# Altium PCB LineDetection.PcbDoc
Units mm, origin at the board's own origin, x right, y up, seen from the top; angles counter-clockwise.
Board outline 100 x 100 mm, 2 copper layers (Top Layer, Bottom Layer); 57 components, 40 nets, 256 pads, 15 vias.
Unrouted connection lines stored in the file: 16.
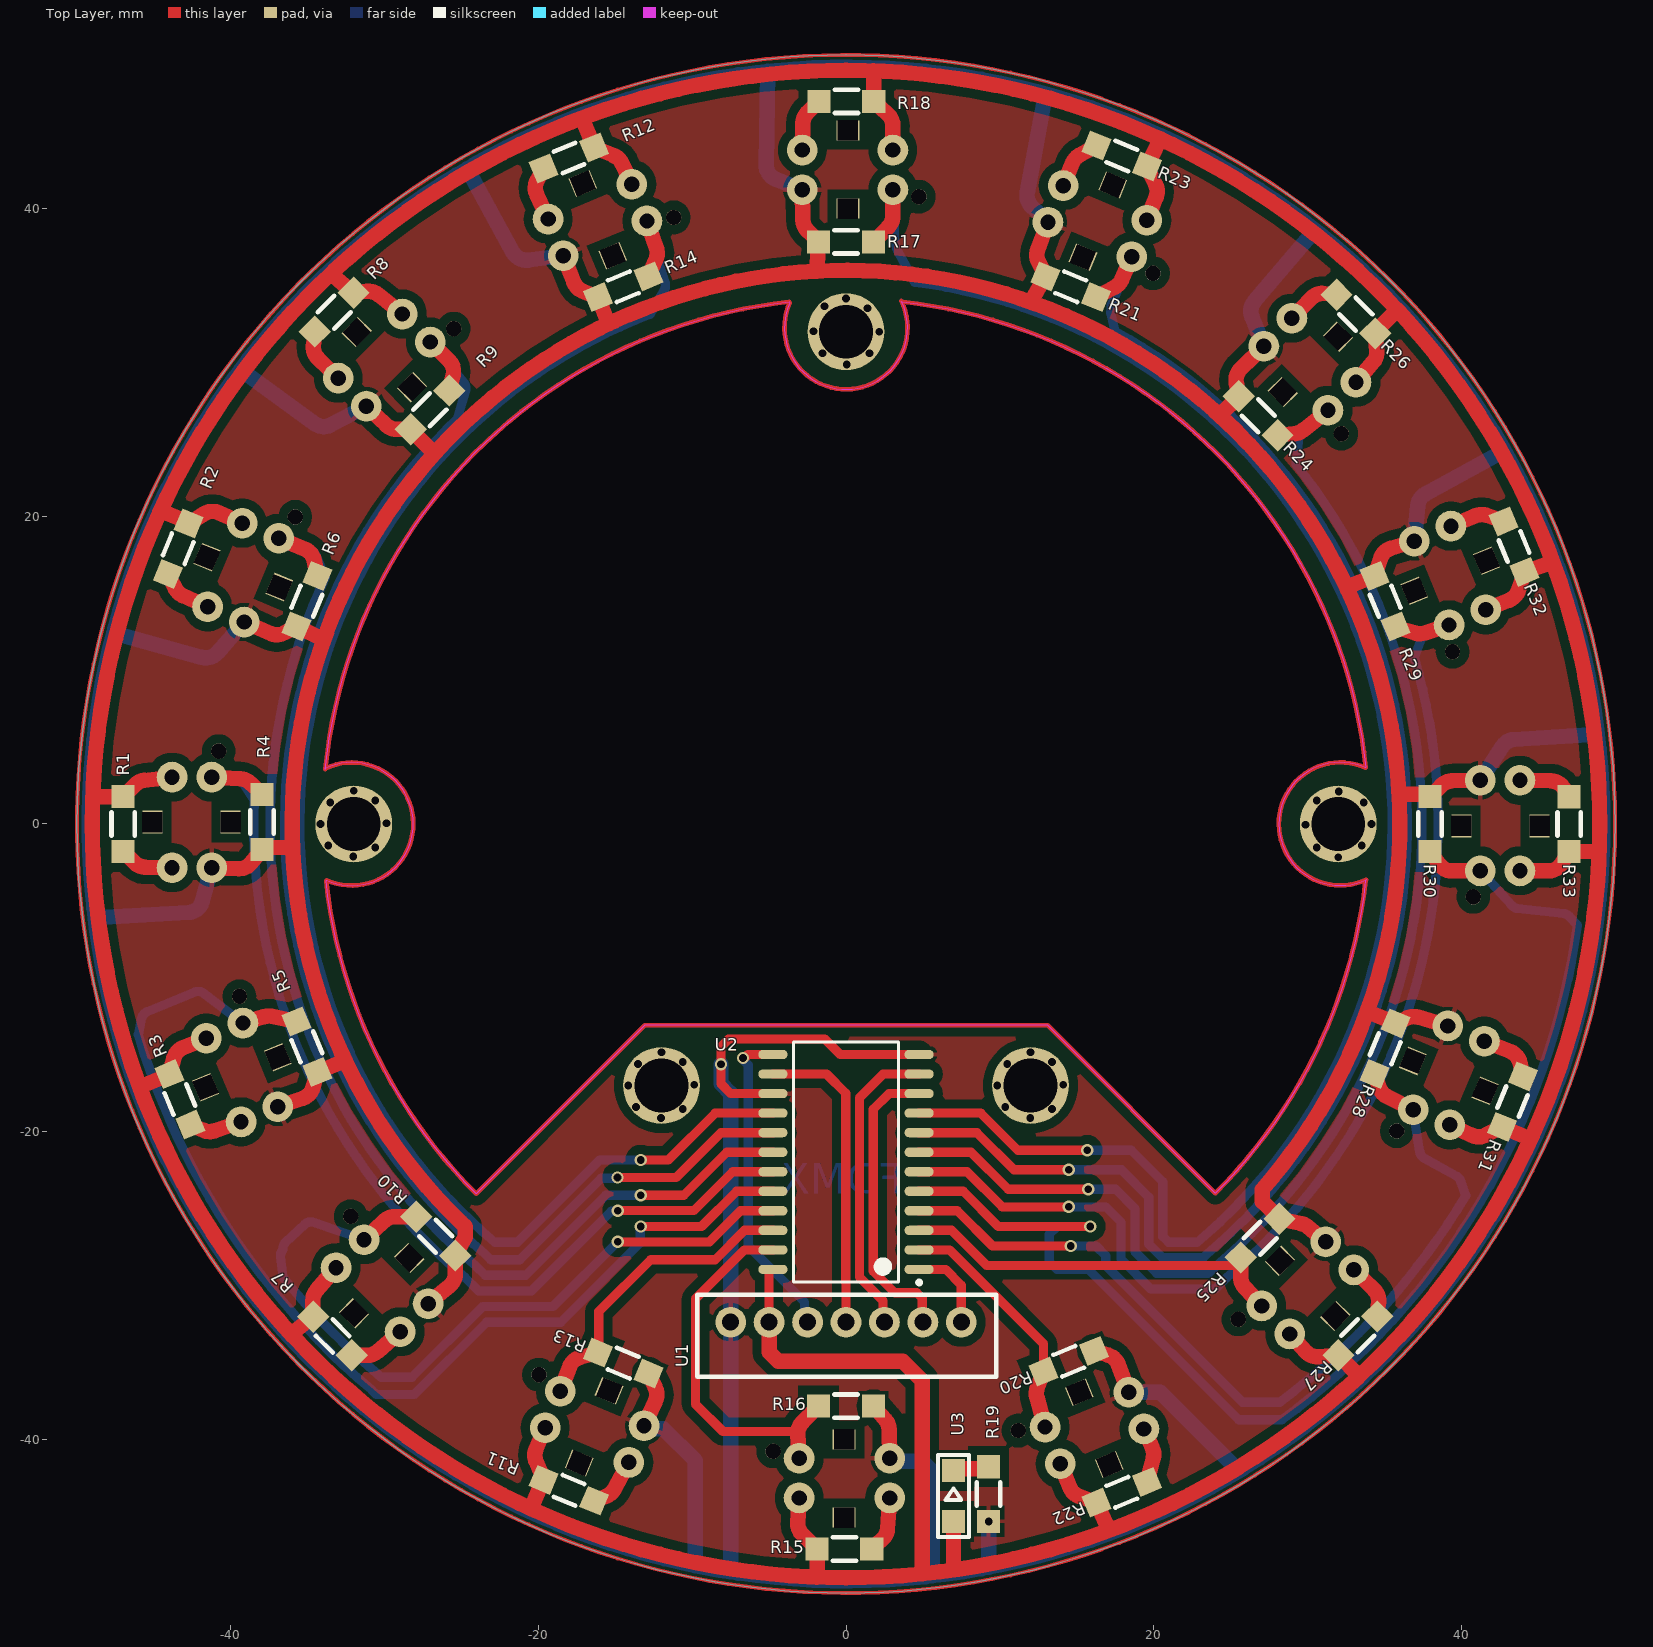
[diagram p0: Top Layer view]
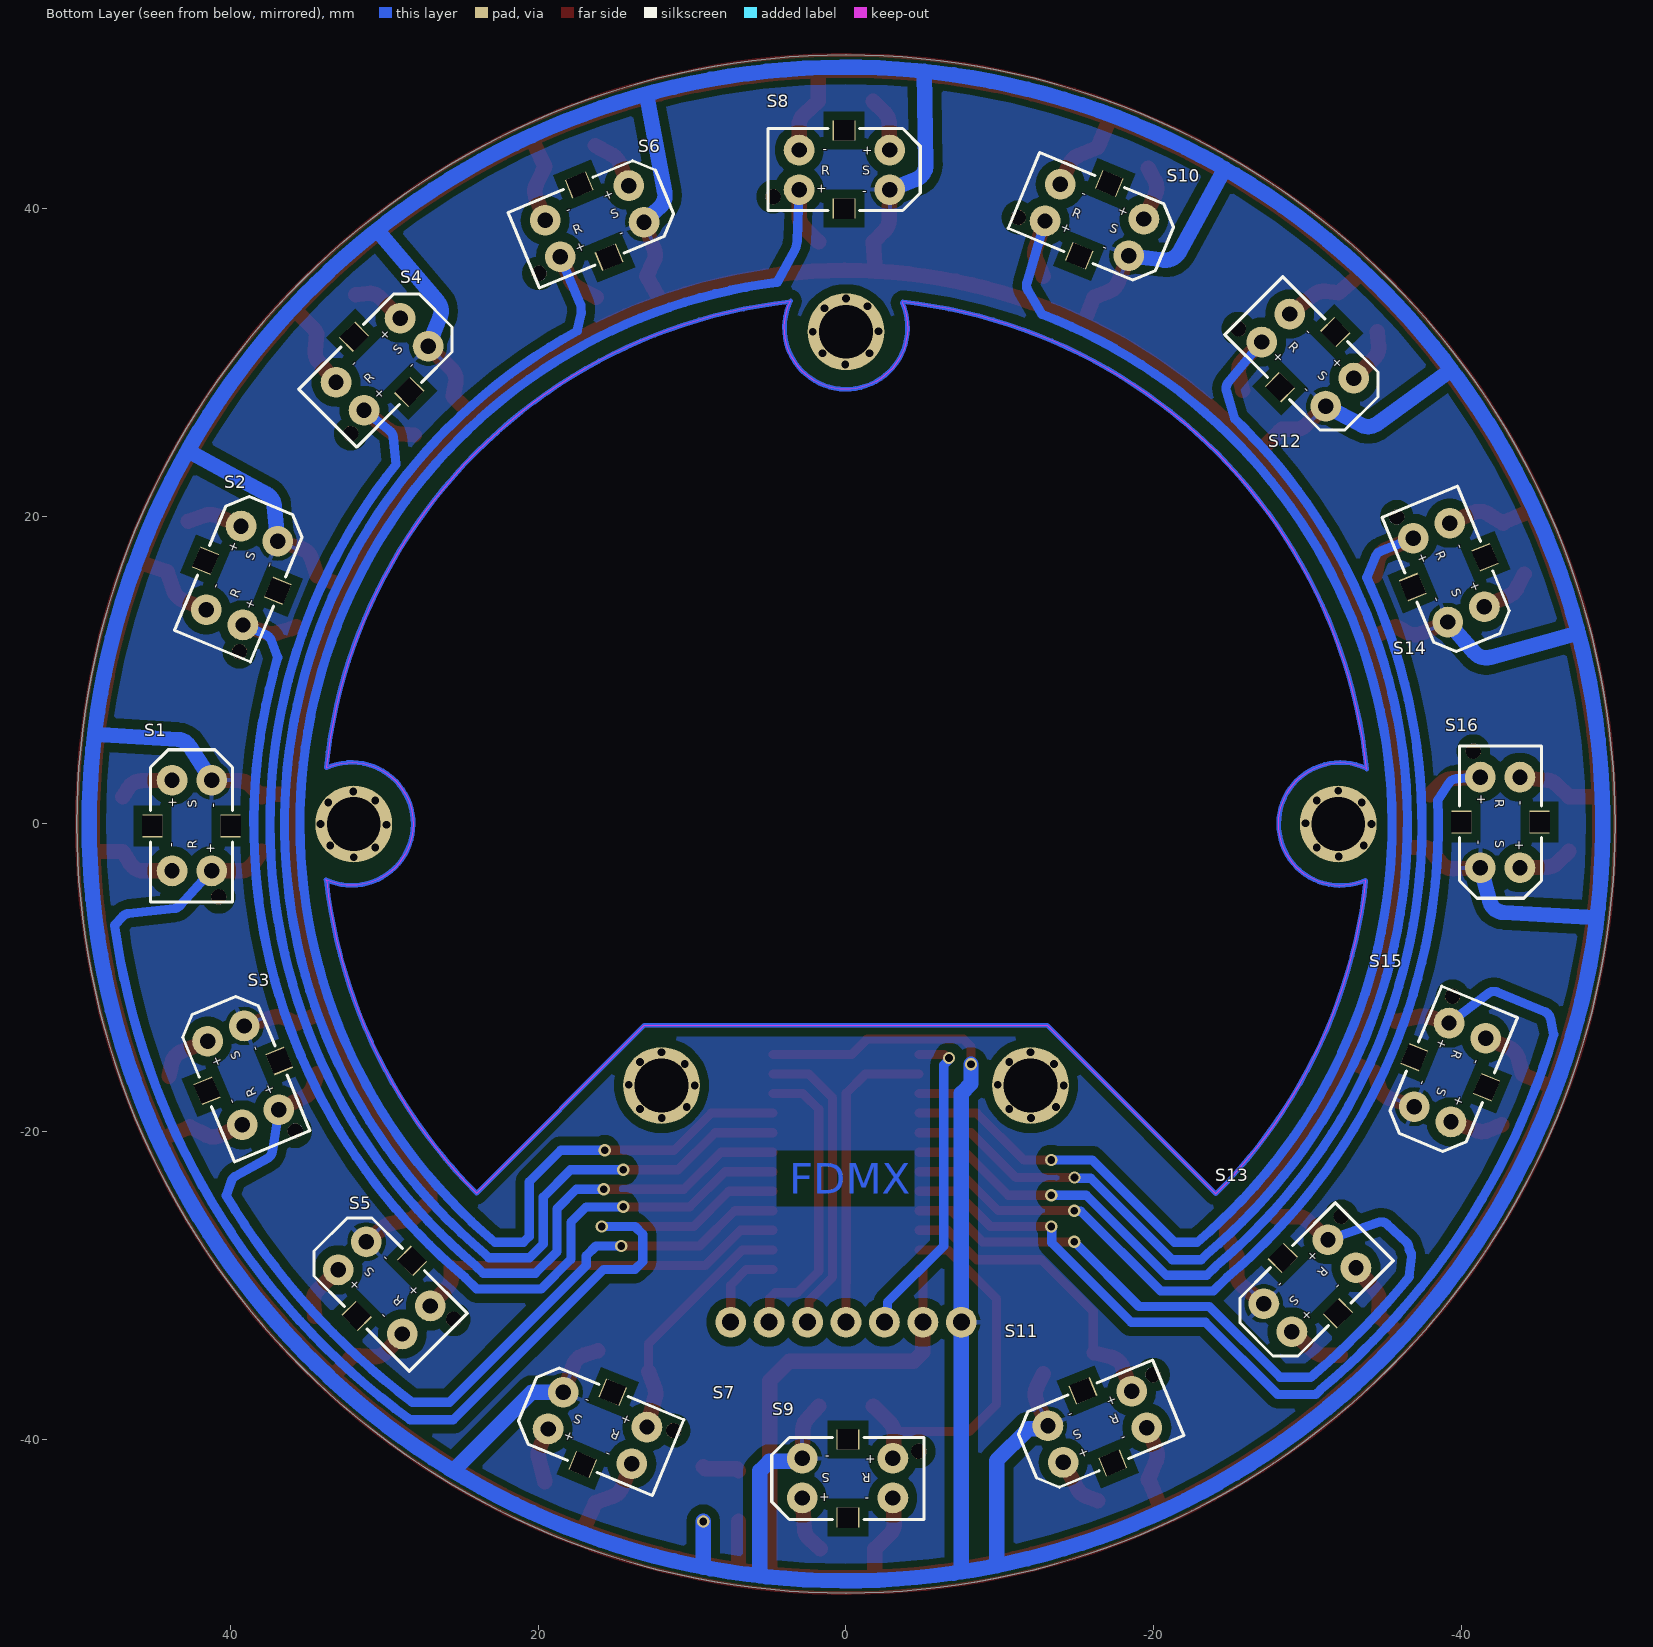
[diagram p1: Bottom Layer view, seen from below]
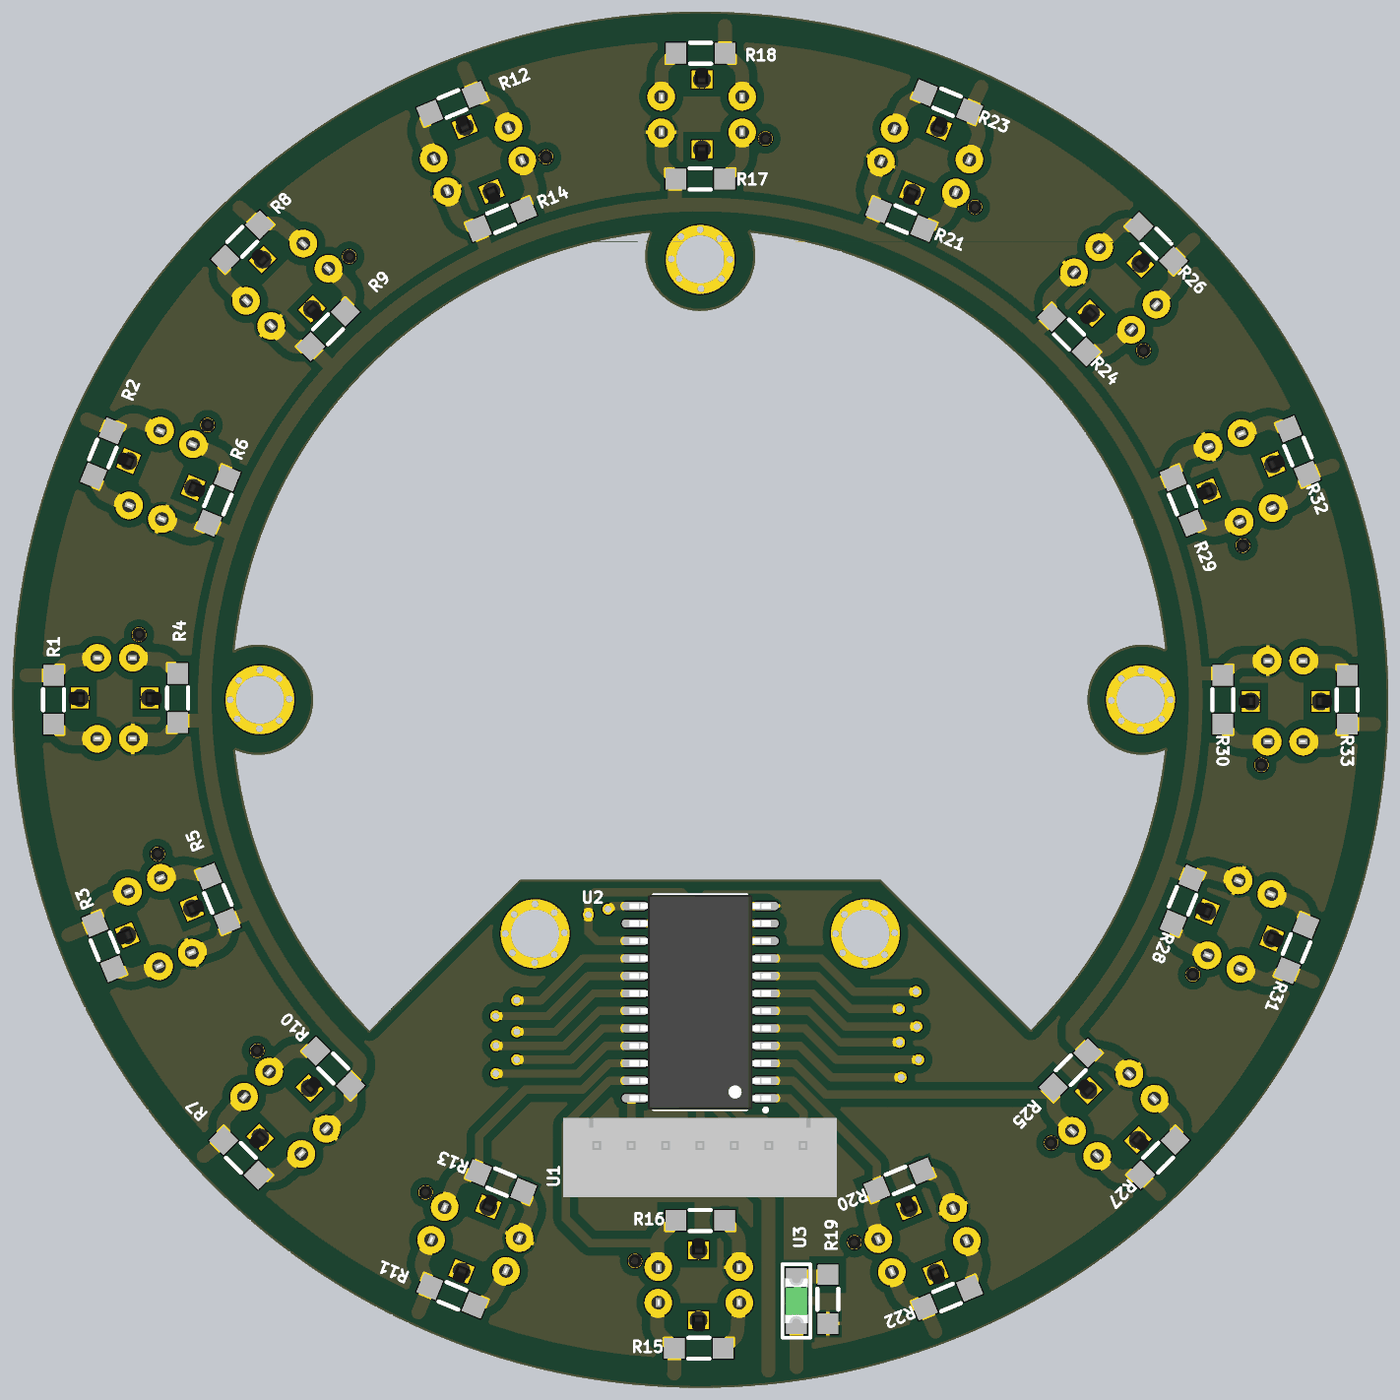
[diagram p2: 3D render of the assembled board from above, using the file's embedded part models]
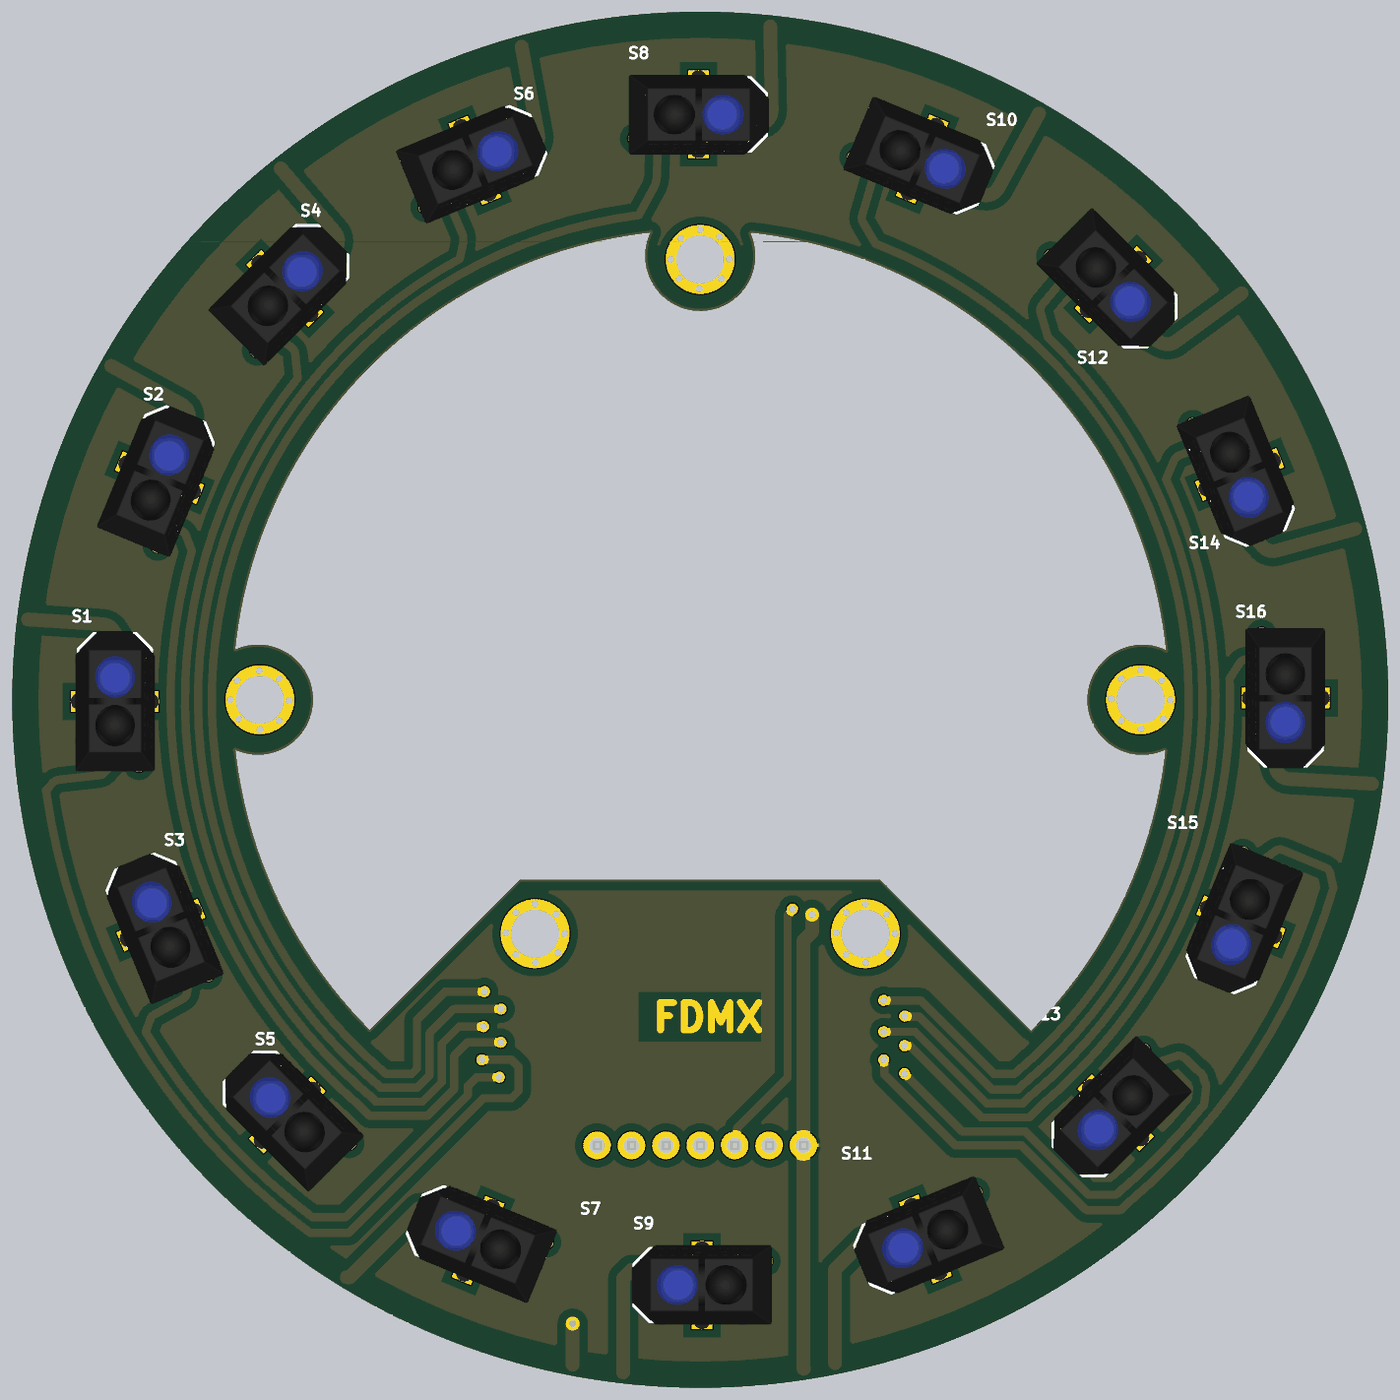
[diagram p3: 3D render of the assembled board from below, using the file's embedded part models]

## Layer stack, top to bottom
Top Solder: solder mask 0.0102, Solder Resist, Dk 3.5
Top Layer: signal copper 0.0356
Dielectric 1: dielectric 0.32, FR-4, Dk 4.8
Bottom Layer: signal copper 0.0356
Bottom Solder: solder mask 0.0102, Solder Resist, Dk 3.5

## Board outline
-50,0 ccw(c0,0) 0,-50 ccw(c0,0) 50,0 ccw(c0,0) 0,50 ccw(c0,0)
cut-out: -24.042,-24.042 cw(c0,0) -33.8,-3.685 -33.767,-3.65 ccw(c-32.131,0) -33.815,3.628 -33.851,3.563 cw(c-0.024,0.143) -3.701,33.943 -3.65,33.894 ccw(c0,32.258) 3.602,33.997 3.673,33.941 cw(c-0.024,0.143) 33.792,3.684 33.771,3.658 ccw(c32.139,0.006) 33.814,-3.626 33.771,-3.682 cw(c-0.024,0.048) 24.018,-23.993 13.106,-13.081 -13.081,-13.081

## Design rules (kind name [scope] priority, off if disabled: settings)
Clearance [All] p1: gap=0.3 ignorepadtopadclearanceinfootprint=FALSE except(0.6: Arc-Fill Arc-Poly Arc-Region Track-Fill Track-Poly Track-Region SMDPad-Fill SMDPad-Poly SMDPad-Region THPad-Fill THPad-Poly THPad-Region Via-Fill Via-Poly Via-Region Fill-Fill Fill-Poly Fill-Region Poly-Poly Poly-Region Region-Region)
PolygonConnect [All] p1: connectstyle=Relief reliefconductorwidth=0.254 reliefentries=4 polygonreliefangle="90 Angle" airgapwidth=0.254
RoutingVias [All] p1: holewidth=0.6 width=0.8 viastyle="Through Hole" minholewidth=0.4 minwidth=0.8 maxholewidth=0.6 maxwidth=1
SolderMaskExpansion [All] p1: expansion=0.102 istentingtop=FALSE
Width [All] p1: maxlimit=10 minlimit=0.254 preferedwidth=0.254
30 further rules are at their usual default settings.

## Components (designator, comment, footprint, x,y, rotation, side; value= is the part's Value field where it differs from the comment)
R1 "Comment" RES1206 -46.99,0 r90 top
R2 "Comment" RES1206 -43.409,17.899 r67.5 top
R3 "Comment" RES1206 -43.307,-17.907 r112.5 top
R4 "Comment" RES1206 -37.973,0.127 r90 top
R5 "Comment" RES1206 -35.052,-14.478 r112.5 top
R6 "Comment" RES1206 -35.052,14.478 r67.5 top
R7 "Comment" RES1206 -33.376,-33.282 r135 top
R8 "Comment" RES1206 -33.274,33.274 r45 top
R9 "Comment" RES1206 -27.051,26.924 r45 top
R10 "Comment" RES1206 -26.67,-26.797 r135 top
R11 "Comment" RES1206 -18.009,-43.315 r157.5 top
R12 "Comment" RES1206 -18.009,43.299 r22.5 top
R13 "Comment" RES1206 -14.478,-35.052 r157.5 top
R14 "Comment" RES1206 -14.478,34.925 r22.5 top
R15 "Comment" RES1206 -0.102,-47.125 r180 top
R16 "Comment" RES1206 0,-37.846 r180 top
R17 "Comment" RES1206 0,37.846 r0 top
R18 "Comment" RES1206 0.025,46.982 r0 top
R19 "Comment" RES1206 9.271,-43.561 r270 top
R20 "Comment" RES1206 14.478,-34.925 r202.5 top
R21 "Comment" RES1206 14.605,34.925 r337.5 top
R22 "Comment" RES1206 17.932,-43.442 r202.5 top
R23 "Comment" RES1206 17.932,43.426 r337.5 top
R24 "Comment" RES1206 26.797,26.543 r315 top
R25 "Comment" RES1206 26.924,-26.924 r225 top
R26 "Comment" RES1206 33.147,33.147 r315 top
R27 "Comment" RES1206 33.274,-33.274 r225 top
R28 "Comment" RES1206 35.052,-14.605 r247.5 top
R29 "Comment" RES1206 35.052,14.478 r292.5 top
R30 "Comment" RES1206 37.973,0 r270 top
R31 "Comment" RES1206 43.332,-18.042 r247.5 top
R32 "Comment" RES1206 43.434,18.034 r292.5 top
R33 "Comment" RES1206 47.015,-0.008 r270 top
S1 "Comment" TCRT-5000 42.545,0 r90 bottom
S2 "Comment" TCRT-5000 39.243,16.256 r112.5 bottom
S3 "Comment" TCRT-5000 39.243,-16.256 r67.5 bottom
S4 "Comment" TCRT-5000 30.099,29.972 r135 bottom
S5 "Comment" TCRT-5000 30.099,-30.099 r45 bottom
S6 "Comment" TCRT-5000 16.256,39.243 r157.5 bottom
S7 "Comment" TCRT-5000 16.256,-39.243 r22.5 bottom
S8 "Comment" TCRT-5000 0,42.545 r180 bottom
S9 "Comment" TCRT-5000 0,-42.545 r0 bottom
S10 "Comment" TCRT-5000 -16.256,39.243 r202.5 bottom
S11 "Comment" TCRT-5000 -16.256,-39.243 r337.5 bottom
S12 "Comment" TCRT-5000 -30.099,30.099 r225 bottom
S13 "Comment" TCRT-5000 -30.099,-30.099 r315 bottom
S14 "Comment" TCRT-5000 -39.243,16.256 r247.5 bottom
S15 "Comment" TCRT-5000 -39.243,-16.256 r292.5 bottom
S16 "Comment" TCRT-5000 -42.545,0 r270 bottom
U1 "Comment" "XH 7PIN" -0.023,-30.861 r180 top
U2 "Comment" 4067 0,-21.971 r180 top
U3 "Comment" "LED GREEN 1206" 6.985,-43.688 r90 top
? "Comment" SCREW 32,0 r180 top
? "Comment" SCREW 0,32 r270 top
? "Comment" SCREW -32,0 r0 top
? "Comment" SCREW -12,-17 r0 top
? "Comment" SCREW 12,-17 r0 top

## Footprints (in the part's own frame and the unit in brackets; to place one, negate y for a bottom-side part, rotate by r counter-clockwise, add the part's x,y. Pads: shape width x height; smd on the part's side, far side on the other; paste and mask are expansions set on the pad)
4067 [mm] "SOP, 24-Leads, Body 15.40x7.50mm, Pitch 1.27mm, IPC Medium Density"
  oval 1.9x0.6 smd: 1(-4.75,6.985) 2(-4.75,5.715) 3(-4.75,4.445) 4(-4.75,3.175) 5(-4.75,1.905) 6(-4.75,0.635) 7(-4.75,-0.635) 8(-4.75,-1.905) 9(-4.75,-3.175) 10(-4.75,-4.445) 11(-4.75,-5.715) 12(-4.75,-6.985) 13(4.75,-6.985) 14(4.75,-5.715) 15(4.75,-4.445) 16(4.75,-3.175) 17(4.75,-1.905) 18(4.75,-0.635) 19(4.75,0.635) 20(4.75,1.905) 21(4.75,3.175) 22(4.75,4.445) 23(4.75,5.715) 24(4.75,6.985)
  silkscreen extent -4.88,-7.8 3.4,7.96, body extent -5.15,-7.8 5.15,7.8, height 2.65
"LED GREEN 1206" [mm]
  rect 1.5x1.5 smd: 1(-1.651,0) 2(1.651,0)
  silkscreen extent -2.67,-1.02 2.67,1.02, body extent -1.63,-0.83 1.64,0.82, height 0.9
RES1206 [mm]
  rect 1.5x1.5 smd: 1(-1.778,0) 2(1.778,0)
  silkscreen extent -0.76,-0.76 0.76,0.76, body extent -1.58,-0.82 1.58,0.82, height 0.53
SCREW [mm]
  round 5 hole 3.5: 1(0,0)
  round 0 hole 0.5: ""(-2.159,0) ""(-1.651,-1.397) ""(-1.524,1.397) ""(-0.031,-2.11) ""(0,2.159) ""(1.397,1.524) ""(1.397,-1.524) ""(2.128,0.059)
TCRT-5000 [mm]
  round 2 hole 1: 1(-3.048,1.27) 2(2.842,1.27) 3(-3.048,-1.306) 4(2.842,-1.306)
  round 1 hole 1: 2(-4.738,-1.761)
  rect 1.5x1.3 hole 1.3 square: 5(-0.127,-2.54) 5(-0.127,2.54)
  silkscreen extent -5.08,-2.67 4.83,2.67, body extent -5.21,-3.42 4.99,3.38, height 7
"XH 7PIN" [mm]
  round 2 hole 1.1: 1(-7.523,1.524) 2(-5.023,1.524) 3(-2.523,1.524) 4(-0.023,1.524) 5(2.477,1.524) 6(4.977,1.524) 7(7.477,1.524)
  silkscreen extent -9.78,-0.25 9.65,5.08, body extent -9.95,-0.46 9.95,5.29, height 7

## Via types
v1: diameter 0.8, hole 0.5, Top Layer to Bottom Layer, 15 vias

## Nets (pads, with @x,y where several pads share a name; then routed paths per layer and width w, separated by ;. In a path a pad name is that pad's centre, name@x,y a point inside that pad or via, vN(x,y) a via of type N, cw(c..) or ccw(c..) an arc to the next point about the centre after c; other vN are vias at no path point)
ADD1: U1.2 U2.10 | length 19.4
  Top Layer w0.6: U2.10 2.794,-17.526 1.778,-18.542 1.778,-29.083 3.175,-30.48 4.602,-30.48 4.953,-30.831 4.953,-32.338 U1.2
ADD2: U1.3 U2.11 | length 19.8
  Top Layer w0.6: U1.3 2.41,-32.295 2.41,-30.988 0.878,-29.456 0.878,-17.791 2.413,-16.256 U2.11
ADD3: U1.4 U2.14 | length 20.1
  Top Layer w0.6: U2.14 -1.27,-16.256 -0.022,-17.504 -0.022,-29.829 0,-29.851 U1.4
ADD4: U1.5 U2.13 | length 21
  Top Layer w0.6: v1(-6.701,-15.21) -6.593,-15.21 -6.369,-14.986 U2.13
  Bottom Layer w0.6: v1(-6.701,-15.21) -6.701,-15.318 -6.35,-15.669 -6.35,-27.432 -2.692,-31.09 -2.692,-32.193 U1.5
GND: R4.1 R5.1 R6.1 R9.1 R10.1 R13.1 R14.1 R16.1 R17.1 R19.2 R20.1 R21.1 R24.1 R25.1 R28.1 R29.1 R30.1 S1.4 S2.4 S3.4 S4.4 S5.4 S6.4 S7.4 S8.4 S9.4 S10.4 S11.4 S12.4 S13.4 S14.4 S15.4 S16.4 U1.7 U2.12 U2.15 | length 733.5
  Top Layer w0.6: U2.15 -7.493,-17.526 -8.128,-16.891 v1(-8.128,-15.621) -8.128,-14.478 -7.631,-13.981 -1.386,-13.981 -0.381,-14.986 U2.12
  Top Layer w1: S16.4 -39.49,-2.903 ccw(c-39.456,-1.904) -38.675,-2.529 R4.1 -37.723,-1.53 -35.965,-1.53 ; S14.4 -37.397,12.383 ccw(c-36.999,13.3) -36.533,12.414 R6.1 -33.949,11.989 ; S15.4 -35.3,-17.823 ccw(c-35.62,-16.876) -34.656,-17.144 R5.1 -32.558,-15.395 -32.544,-15.389 ; S12.4 -29.886,25.934 ccw(c-29.196,26.658) -29.188,25.658 -29.186,25.658 R9.1 -28.135,25.486 -26.745,24.096 ; S13.4 -25.765,-30.021 ccw(c-26.404,-29.252) -25.404,-29.246 -25.404,-29.244 R10.1 -24.873,-27.084 -24.747,-26.857 -24.747,-26.598 -24.747,-26.183 -25.038,-25.892 ccw(c-25.747,-26.597) -25.041,-25.889 -25.045,-25.885 cw(c-0.002,-0.014) 27.063,-23.761 27.063,-24.134 27.063,-24.549 R25.1 29.604,-25.982 29.606,-25.982 cw(c29.388,-26.958) 30.033,-26.194 S5.4 ; S10.4 -17.687,35.202 ccw(c-16.757,35.57) -17.124,34.64 ; -17.123,34.639 R14.1 -15.436,32.517 ; S11.4 -12.388,-37.509 ccw(c-13.296,-37.091) -12.393,-36.663 -12.393,-36.661 R13.1 ; S8.4 -2.802,39.266 ccw(c-1.802,39.285) -2.511,38.579 -2.509,38.577 R17.1 -1.892,35.943 ; R16.1 2.549,-38.714 ; 2.55,-38.715 cw(c1.802,-39.378) 2.802,-39.357 S9.4 ; 12.025,33.924 R21.1 12.501,36.574 12.501,36.575 cw(c13.404,37.004) 12.467,37.353 S6.4 ; R20.1 17.054,-34.528 17.056,-34.528 cw(c16.763,-35.485) 17.7,-35.133 S7.4 ; 24.276,26.576 R24.1 25.373,28.683 25.372,28.685 cw(c26.355,28.869) 25.657,29.585 S4.4 ; 32.546,15.383 R29.1 34.76,17.286 34.761,17.288 cw(c35.709,16.97) 35.424,17.928 S2.4 ; 33.877,-12.18 33.88,-12.182 33.885,-12.184 35.506,-12.855 R28.1 36.484,-12.609 36.486,-12.608 cw(c36.91,-13.513) 37.196,-12.555 S3.4 ; 35.948,1.926 37.825,1.926 R30.1 38.705,2.51 cw(c39.412,1.803) 39.391,2.803 S1.4
  Bottom Layer w1: -48.82,-6.103 -42.752,-5.756 ccw(c-42.809,-4.757) -41.846,-5.027 -41.845,-5.025 S16.4 ; -47.608,12.414 -41.882,10.835 ccw(c-41.615,11.799) -40.862,11.141 S14.4 ; -39.345,29.54 -34.541,26.023 ccw(c-33.951,26.831) -33.482,25.948 S12.4 ; -24.616,42.599 -21.663,37.177 ccw(c-20.784,37.654) -20.661,36.661 -20.659,36.662 S10.4 ; S11.4 -12.939,-39.316 -11.865,-39.316 -9.796,-41.385 -9.796,-48.215 ; v1(-8.128,-15.621) -8.128,-16.877 -7.5,-17.506 -7.5,-48.591 -7.529,-48.62 ; -5.084,48.937 -5.194,42.861 ccw(c-4.195,42.842) -4.56,41.911 ; -4.559,41.911 S8.4 ; S9.4 3.033,-41.431 4.982,-41.431 5.601,-42.05 5.601,-48.88 ; v1(9.271,-45.339) 9.271,-48.306 9.282,-48.317 ; 12.978,47.458 11.783,41.046 ccw(c12.766,40.861) 12.072,40.141 12.073,40.139 S6.4 ; S7.4 20.439,-36.949 25.453,-41.963 25.686,-41.963 ; S4.4 26.391,32.966 26.39,32.967 cw(c27.317,33.343) 26.556,33.991 30.486,38.616 ; S2.4 37.162,20.678 37.162,20.681 cw(c38.158,20.586) 37.68,21.465 42.803,24.259 ; S1.4 42.653,5.036 cw(c43.493,4.495) 43.43,5.493 48.853,5.837 ; 49.2,0 ccw(c0,0) 49.2,0
LED: R19.1 U3.2 | length 2.4
  Top Layer w1: U3.2 7.112,-41.91 9.144,-41.91 R19.1
LED0: R18.1 S8.2@-2.842,43.815 | length 3.6
  Top Layer w1: S8.2@-2.842,43.815 -2.803,45.565 cw(c-1.803,45.541) -2.499,46.26 R18.1
LED1: R23.1 S6.2@14.116,41.504 | length 3.6
  Top Layer w1: S6.2@14.116,41.504 14.726,42.983 cw(c15.651,42.604) 15.163,43.477 R23.1
LED2: R26.1 S4.2@28.987,32.88 | length 3.5
  Top Layer w1: S4.2@28.987,32.88 30.266,34.193 cw(c30.984,33.497) R26.1@31.091,34.491 ; R26.1@31.092,34.491 R26.1
LED3: R32.1 S2.2@39.329,19.368 | length 3.6
  Top Layer w1: S2.2@39.329,19.368 40.919,20.042 cw(c41.31,19.122) 41.638,20.066 41.64,20.066 R32.1
LED4: R33.1 S1.2@43.815,2.842 | length 3.7
  Top Layer w1: S1.2@43.815,2.842 45.822,2.804 cw(c45.803,1.804) 46.643,2.347 46.644,2.346 R33.1
LED5: R31.1 S3.2@41.504,-14.116 | length 3.7
  Top Layer w1: S3.2@41.504,-14.116 43.2,-14.792 cw(c42.83,-15.721) 43.805,-15.496 43.805,-15.498 R31.1
LED6: R27.1 S5.2@33.007,-28.987 | length 3.7
  Top Layer w1: S5.2@33.007,-28.987 34.326,-30.271 cw(c33.628,-30.988) 34.624,-31.085 34.623,-31.086 R27.1
LED7: R22.1 S7.2@19.368,-39.329 | length 3.6
  Top Layer w1: S7.2@19.368,-39.329 19.923,-40.572 cw(c19.009,-40.98) 19.977,-41.233 19.976,-41.235 R22.1
LED8: R15.1 S9.2@2.842,-43.815 | length 3.7
  Top Layer w1: R15.1 2.37,-46.497 ccw(c1.699,-45.756) 2.696,-45.828 S9.2@2.842,-43.815
LED9: R11.1 S11.2@-14.116,-41.504 | length 3.5
  Top Layer w1: R11.1 -15.582,-43.693 -15.58,-43.692 ccw(c-15.942,-42.76) -15.064,-43.239 S11.2@-14.116,-41.504
LED10: R7.1 S13.2@-28.987,-33.007 | length 3.7
  Top Layer w1: R7.1 -31.113,-34.543 -31.111,-34.543 ccw(c-31.11,-33.543) -30.45,-34.294 S13.2@-28.987,-33.007
LED11: R3.1 S15.2@-39.329,-19.368 | length 3.5
  Top Layer w1: R3.1 -41.751,-19.919 -41.749,-19.919 ccw(c-41.362,-18.997) -41.043,-19.945 S15.2@-39.329,-19.368
LED12: R1.1 S16.2@-43.815,-2.842 | length 3.6
  Top Layer w1: R1.1 -46.258,-2.51 -46.256,-2.512 ccw(c-45.551,-1.803) -45.571,-2.803 S16.2@-43.815,-2.842
LED13: R2.1 S14.2@-41.504,14.116 | length 3.5
  Top Layer w1: R2.1 -43.594,15.296 -43.593,15.294 ccw(c-42.705,15.755) -43.118,14.844 S14.2@-41.504,14.116
LED14: R8.1 S12.2@-33.007,28.987 | length 3.7
  Top Layer w1: R8.1 -34.623,31.086 -34.624,31.085 ccw(c-33.628,30.988) -34.327,30.273 S12.2@-33.007,28.987
LED15: R12.1 S10.2@-19.368,39.329 | length 3.6
  Top Layer w1: R12.1 -20.078,41.843 -20.079,41.841 ccw(c-19.201,41.362) -20.109,40.943 S10.2@-19.368,39.329
OUT: U1.1 U2.1 | length 5.6
  Top Layer w0.6: U2.1 6.477,-28.956 7.5,-29.979 U1.1
S0: R17.2 S8.2@4.738,40.784 S8.3 U2.9 | length 116.1
  Top Layer w0.6: U2.9 8.763,-18.796 11.176,-21.209 v1(15.685,-21.209)
  Top Layer w1: R17.2 2.755,38.823 ccw(c2.048,39.53) 3.048,39.53 S8.3
  Bottom Layer w0.6: S8.3 3.163,37.939 ccw(c3.763,37.961) 3.178,37.824 3.259,37.482 ccw(c3.843,37.62) 3.315,37.334 4.466,35.218 cw(c0,0) 22.819,-27.195 20.972,-27.195 20.585,-26.808 20.585,-23.252 18.542,-21.209 v1(15.685,-21.209)
S1: R21.2 S6.2@19.96,35.803 S6.3 U2.8 | length 103.7
  Top Layer w0.6: U2.8 8.509,-20.066 10.922,-22.479 v1(14.478,-22.479)
  Top Layer w1: R21.2 17.47,34.888 ccw(c17.003,35.773) 17.92,35.374 S6.3
  Bottom Layer w0.6: v1(14.478,-22.479) 17.907,-22.479 19.685,-24.257 19.685,-27.305 20.574,-28.194 23.228,-28.194 23.462,-27.961 ccw(c0,0) 17.478,32.043 17.229,33.154 17.229,33.155 cw(c17.814,33.285) 17.221,33.374 17.221,33.583 cw(c17.821,33.583) 17.269,33.819 S6.3
S2: R24.2 S4.2@32.205,25.377 S4.3 U2.7 | length 90.6
  Top Layer w0.6: U2.7 8.128,-21.336 10.541,-23.749 v1(15.748,-23.749)
  Top Layer w1: R24.2 29.159,25.375 29.161,25.375 ccw(c29.078,26.372) 29.704,25.592 S4.3
  Bottom Layer w0.6: v1(15.748,-23.749) 17.526,-23.749 18.785,-25.008 18.785,-27.802 20.193,-29.21 23.581,-29.21 24.051,-28.74 ccw(c-0.054,-0.014) 29.256,23.379 29.438,25.15 29.438,25.152 cw(c30.035,25.088) 29.661,25.558 S4.3
S3: R29.2 S2.2@39.43,11.205 S2.3 U2.6 | length 76.4
  Top Layer w0.6: U2.6 7.871,-22.606 10.157,-24.892 v1(14.478,-24.892)
  Top Layer w1: R29.2 36.059,12.7 37.036,12.409 37.037,12.409 ccw(c37.321,13.367) 37.637,12.419 S2.3
  Bottom Layer w0.6: v1(14.478,-24.892) 16.891,-24.892 17.885,-25.886 17.885,-28.299 19.812,-30.226 24.014,-30.226 24.747,-29.493 ccw(c0,0) 36.948,10.821 37.375,11.953 cw(c37.937,11.742) 37.699,12.293 S2.3
S4: R30.2 S1.2@40.784,-4.738 S1.3 U2.5 | length 86.1
  Top Layer w0.6: U2.5 7.62,-23.876 9.906,-26.162 v1(15.875,-26.162)
  Top Layer w1: R30.2 38.563,-2.621 38.564,-2.623 ccw(c39.383,-2.048) 39.383,-3.048 S1.3
  Bottom Layer w0.6: v1(15.875,-26.162) 13.716,-26.162 13.208,-26.67 13.208,-28.448 13.716,-28.956 15.748,-28.956 25.527,-38.735 28.328,-38.735 ; 28.335,-38.745 ccw(c0,0) 47.547,-6.576 47.015,-6.005 47.013,-6.003 ccw(c46.576,-6.414) 46.642,-5.817 43.659,-5.486 43.658,-5.486 cw(c43.725,-4.89) 43.28,-5.292 S1.3
S5: R28.2 S3.2@35.803,-19.96 S3.3 U2.4 | length 57.9
  Top Layer w0.6: U2.4 7.239,-25.146 9.525,-27.432 v1(14.605,-27.432)
  Top Layer w1: R28.2 34.668,-17.135 34.668,-17.138 ccw(c35.616,-16.819) 35.164,-17.711 S3.3
  Bottom Layer w0.6: v1(14.605,-27.432) 16.256,-27.432 16.891,-28.067 16.891,-28.702 25.781,-37.592 28.203,-37.592 ccw(c-0.278,0.202) 40.298,-24.153 39.955,-23.2 ccw(c39.39,-23.403) 39.679,-22.878 37.597,-21.732 ; S3.3 37.293,-21.297 ccw(c37.886,-21.206) 37.596,-21.732
S6: R25.2 S5.2@25.504,-32.205 S5.3 U2.3 | length 24.9
  Top Layer w0.6: U2.3 6.858,-26.416 9.144,-28.702 25.548,-28.702 R25.2@25.662,-28.816
  Top Layer w1: R25.2@25.662,-28.816 25.657,-29.451 25.657,-29.452 ccw(c26.657,-29.458) 25.92,-30.134 S5.3
S7: R20.2 S7.2@11.205,-39.43 S7.3 U2.2 | length 16.2
  Top Layer w0.6: U2.2 6.731,-27.686 12.835,-33.79 R20.2
  Top Layer w1: 12.436,-36.65 ccw(c13.37,-37.007) 12.406,-37.273 S7.3 ; 12.436,-36.65 R20.2
S8: R16.2 S9.2@-4.738,-40.784 S9.3 U2.23 | length 24.6
  Top Layer w0.6: U2.23 -6.601,-27.686 -9.779,-30.864 -9.779,-37.719 -8.001,-39.497 -3.342,-39.497 -3.146,-39.692
  Top Layer w1: -3.146,-39.692 S9.3 ; -3.146,-39.692 cw(c-2.148,-39.631) -2.855,-38.923 R16.2
S9: R13.2 S11.2@-19.96,-35.803 S11.3 U2.22 | length 20.1
  Top Layer w0.6: R13.2 -16.071,-34.322 -16.071,-31.692 -12.7,-28.321 -8.509,-28.321 -6.604,-26.416 U2.22
  Top Layer w1: S11.3 -17.965,-35.281 cw(c-17.031,-35.638) -17.281,-34.67 -17.279,-34.669 R13.2
S10: R10.2 S13.2@-32.205,-25.504 S13.3 U2.21 | length 51.2
  Top Layer w0.6: v1@-14.859,-27.178 v1(-14.848,-27.167) -8.879,-27.167 -6.858,-25.146 U2.21
  Top Layer w1: S13.3 -30.009,-25.796 cw(c-29.329,-26.53) -29.324,-25.53 -29.322,-25.53 R10.2
  Bottom Layer w0.6: S13.3 -34.584,-25.899 ccw(c-34.779,-26.466) -35.189,-26.027 -36.417,-27.173 ccw(c-36.007,-27.612) -36.607,-27.61 -36.607,-27.671 -36.632,-27.702 ccw(c-36.165,-28.079) -36.761,-28.147 -36.61,-29.438 ccw(c0,0.036) -30.211,-35.968 -28.221,-35.968 -23.622,-31.369 -19.05,-31.369 v1(-14.848,-27.167)
S11: R5.2 S15.2@-39.43,-11.205 S15.3 U2.20 | length 72.7
  Top Layer w0.6: v1(-13.335,-26.162) -9.398,-26.162 -7.112,-23.876 U2.20
  Top Layer w1: S15.3 -37.838,-12.522 cw(c-37.545,-13.478) -37.341,-12.499 ; -37.34,-12.499 R5.2
  Bottom Layer w0.6: S15.3 -41.763,-11.002 ccw(c-42.125,-11.481) -42.353,-10.926 -42.355,-10.926 -45.427,-12.198 ccw(c-45.198,-12.752) -45.785,-12.627 -45.785,-12.629 -46.008,-13.685 ccw(c0,0) -30.854,-36.77 -30.54,-37.084 -28.064,-37.084 -23.365,-32.385 -18.542,-32.385 -13.373,-27.216 -13.373,-26.2 v1(-13.335,-26.162)
S12: R4.2 S16.2@-40.784,4.738 S16.3 U2.19 | length 65.9
  Top Layer w0.6: v1@-14.859,-25.146 v1(-14.848,-25.135) -9.895,-25.135 -7.366,-22.606 U2.19
  Top Layer w1: S16.3 -39.37,2.942 cw(c-39.426,1.944) -38.719,2.651 R4.2
  Bottom Layer w0.6: S16.3 -39.669,2.941 cw(c-39.709,2.343) -39.207,2.671 ; -39.207,2.67 -38.469,1.539 ccw(c0,0) -24.747,-29.493 -23.887,-30.353 -20.447,-30.353 -15.267,-25.173 -14.886,-25.173 v1(-14.848,-25.135)
S13: R6.2 S14.2@-35.803,19.96 S14.3 U2.18 | length 80.3
  Top Layer w0.6: v1(-13.335,-24.13) -10.541,-24.13 -7.747,-21.336 U2.18
  Top Layer w1: S14.3 -35.164,17.859 cw(c-35.55,16.937) -34.569,17.129 ; -34.568,17.128 R6.2
  Bottom Layer w0.6: S14.3 -34.777,17.745 cw(c-34.997,17.187) -34.446,17.424 -34.446,17.423 -33.846,16.019 ccw(c0.054,-0.014) -24.051,-28.74 -23.454,-29.337 -20.828,-29.337 -15.621,-24.13 v1(-13.335,-24.13)
S14: R9.2 S12.2@-25.504,32.205 S12.3 U2.17 | length 93.2
  Top Layer w0.6: v1(-14.859,-22.987) -11.049,-22.987 -8.128,-20.066 U2.17
  Top Layer w1: S12.3 -25.805,30.121 cw(c-26.511,29.412) -25.542,29.164 R9.2
  Bottom Layer w0.6: S12.3 -24.842,28.695 cw(c-25.305,28.313) -24.729,28.142 -24.73,28.141 -25.269,26.339 ccw(c0,0) -23.462,-27.961 -23.101,-28.321 -21.206,-28.321 -15.91,-23.025 -14.897,-23.025 v1(-14.859,-22.987)
S15: R14.2 S10.2@-11.205,39.43 S10.3 U2.16 | length 105.6
  Top Layer w0.6: v1(-13.335,-21.844) -11.557,-21.844 -8.509,-18.796 U2.16
  Top Layer w1: S10.3 -12.323,37.455 cw(c-13.266,37.122) -12.349,36.723 R14.2
  Bottom Layer w0.6: v1(-13.335,-21.844) -16.002,-21.844 -21.353,-27.195 -22.819,-27.195 cw(c0,0) -12.744,33.134 -11.817,34.701 ccw(c-12.333,35.006) -11.757,35.175 S10.3
VCC: R1.2 R2.2 R3.2 R7.2 R8.2 R11.2 R12.2 R15.2 R18.2 R22.2 R23.2 R26.2 R27.2 R31.2 R32.2 R33.2 S1.1 S2.1 S3.1 S4.1 S5.1 S6.1 S7.1 S8.1 S9.1 S10.1 S11.1 S12.1 S13.1 S14.1 S15.1 S16.1 U1.6 U2.24 U3.1 | length 431.2
  Top Layer w0.6: U1.6 -5,-28.956 U2.24
  Top Layer w1: -48.968,1.776 R1.2 -46.219,2.549 cw(c-45.512,1.841) -45.629,2.835 S16.1 ; -45.922,-17.093 -44.209,-16.384 R3.2 -43.693,-15.205 -43.692,-15.203 cw(c-42.729,-15.473) -43.106,-14.547 S15.1 ; -44.564,20.372 -42.935,19.697 R2.2 -41.723,20.168 cw(c-41.194,19.319) -40.792,20.235 S14.1 ; -36.073,-33.162 R7.2 R7.2@-34.661,-30.993 ; R7.2@-34.661,-30.992 cw(c-33.661,-30.967) -34.419,-30.314 S13.1 ; -33.483,35.775 R8.2 -31.145,34.626 cw(c-31.037,33.632) -30.411,34.412 S12.1 ; -20.477,-44.516 -19.787,-42.85 R11.2 -20.159,-41.411 -20.159,-41.41 cw(c-19.235,-41.029) -20.153,-40.633 S11.1 ; -17.163,45.896 -16.465,44.209 R12.2 -15.093,43.455 -15.091,43.455 cw(c-15.473,42.53) -14.567,42.954 S10.1 ; U1.6 -5,-34.339 -4.414,-34.925 3.683,-34.925 4.951,-36.193 4.951,-48.749 ; S9.1 -3.147,-45.391 ccw(c-2.149,-45.455) -2.853,-46.165 -2.851,-46.167 R15.2 -1.88,-48.936 -1.908,-48.963 ; 1.776,48.968 1.803,48.941 R18.2 2.721,46.144 2.722,46.144 cw(c2.048,45.405) 3.048,45.405 S8.1 ; U3.1 6.985,-48.481 7.001,-48.497 ; S7.1 14.565,-43.151 ccw(c15.49,-42.771) 15.148,-43.711 15.151,-43.712 R22.2 17.093,-45.922 ; S6.1 20.158,40.745 ccw(c19.23,41.118) 20.137,41.54 20.136,41.541 R23.2 20.429,44.538 ; S5.1 29.898,-34.311 ccw(c30.636,-33.636) 30.712,-34.633 30.713,-34.633 R27.2 33.347,-35.902 ; S4.1 34.271,30.032 ccw(c33.51,30.68) 34.506,30.77 R26.2 34.531,32.117 35.834,33.42 ; S3.1 40.704,-20.239 ccw(c41.131,-19.335) 41.581,-20.227 41.583,-20.227 R31.2 42.875,-19.798 44.516,-20.477 ; S2.1 43.134,14.558 ccw(c42.758,15.485) 43.706,15.168 R32.2 45.953,17.01 ; S1.1 45.673,-3.048 ccw(c45.673,-2.048) 46.521,-2.579 46.522,-2.577 R33.2 48.968,-1.781 ; 49,0 ccw(c0,0) 49,0
pads on no net: ?. ?.1 S1.5 S2.5 S3.5 S4.5 S5.5 S6.5 S7.5 S8.5 S9.5 S10.5 S11.5 S12.5 S13.5 S14.5 S15.5 S16.5
copper on no net: | length 801.3
  Top Layer w0.254: 50,0 ccw(c0,0) 50,0
  Top Layer w0.3: -33.851,3.563 cw(c-0.024,0.143) -3.701,33.943 ; -33.815,3.628 cw(c-32.131,0) -33.767,-3.65 ; -33.8,-3.685 ccw(c0,0) -24.042,-24.042 -13.081,-13.081 13.106,-13.081 24.018,-23.993 ccw(c-0.024,0.048) 33.771,-3.682 ; -3.65,33.894 ccw(c0,32.258) 3.602,33.997 ; 3.673,33.941 cw(c-0.024,0.143) 33.792,3.684 ; 33.771,3.658 ccw(c32.139,0.006) 33.814,-3.626
  Bottom Layer w0.3: -33.851,3.563 cw(c-0.024,0.143) -3.701,33.943 ; -33.815,3.628 cw(c-32.131,0) -33.767,-3.65 ; -33.8,-3.685 ccw(c0,0) -24.042,-24.042 -13.081,-13.081 13.106,-13.081 24.018,-23.993 ccw(c-0.024,0.048) 33.771,-3.682 ; -3.65,33.894 ccw(c0,32.258) 3.602,33.997 ; 3.673,33.941 cw(c-0.024,0.143) 33.792,3.684 ; 33.771,3.658 ccw(c32.139,0.006) 33.814,-3.626

## Polygon pours and split planes (outlines as drawn)
GND on Bottom Layer "GND_L02_P002" (solid, pour order 2): -50,0 ccw(c0,0) 0,-50 ccw(c0,0) 50,0 ccw(c0,0) 0,50 ccw(c0,0)
GND on Top Layer "GND_L01_P000" (solid, pour order 0): -50,0 ccw(c0,0) 0,-50 ccw(c0,0) 50,0 ccw(c0,0) 0,50 ccw(c0,0)

## Other copper
Bottom Layer:
  text "FDMX" at 3.697,-24.035 h2

## Silkscreen, mask and mechanical layers (free items; w line width, h text height)
Bottom Solder:
  text "FDMX" at 3.691,-24.011 h2
Mechanical 1:
  circle w0.254: c0,-0.012 r50
  lines w0.2: -24.042,-24.053 -13.081,-13.093 13.106,-13.093 24.018,-24.005
  lines w0.254: -33.851,3.551 cw(c-0.024,0.131) -3.701,33.932 ; -33.815,3.616 cw(c-32.131,-0.012) -33.767,-3.662 ; -33.8,-3.697 ccw(c0,-0.012) -24.042,-24.053 ; -3.65,33.883 ccw(c0,32.246) 3.602,33.985 ; 3.673,33.929 cw(c-0.024,0.131) 33.792,3.672 ; 24.018,-24.005 ccw(c-0.024,0.037) 33.771,-3.693 ; 33.771,3.646 ccw(c32.139,-0.006) 33.814,-3.638

## Text inside footprints (layer, text, board x,y; h text height)
S1: Bottom Overlay "R" at 42.197,-1.618 h0.6 r270; Bottom Overlay "S" at 42.197,1.049 h0.6 r270; Bottom Overlay "-" at 44.062,-1.235 h0.6 r90; Bottom Overlay "+" at 41.56,-1.255 h0.6 r90; Bottom Overlay "-" at 40.881,1.049 h0.6 r270; Bottom Overlay "+" at 43.494,1.049 h0.6 r270
S2: Bottom Overlay "+" at 39.718,17.588 h0.6 r292.5; Bottom Overlay "-" at 37.304,16.588 h0.6 r292.5; Bottom Overlay "+" at 38.814,14.72 h0.6 r112.5; Bottom Overlay "-" at 41.117,15.696 h0.6 r112.5; Bottom Overlay "S" at 38.52,17.092 h0.6 r292.5; Bottom Overlay "R" at 39.541,14.628 h0.6 r292.5
S3: Bottom Overlay "+" at 40.521,-15.65 h0.6 r247.5; Bottom Overlay "-" at 38.107,-14.65 h0.6 r247.5; Bottom Overlay "+" at 37.853,-17.039 h0.6 r67.5; Bottom Overlay "-" at 40.172,-17.977 h0.6 r67.5; Bottom Overlay "S" at 39.323,-15.154 h0.6 r247.5; Bottom Overlay "R" at 38.302,-17.618 h0.6 r247.5
S4: Bottom Overlay "+" at 30.028,31.385 h0.6 r315; Bottom Overlay "-" at 28.181,29.537 h0.6 r315; Bottom Overlay "+" at 30.29,28.388 h0.6 r135; Bottom Overlay "-" at 32.044,30.171 h0.6 r135; Bottom Overlay "S" at 29.111,30.468 h0.6 r315; Bottom Overlay "R" at 30.997,28.582 h0.6 r315
S5: Bottom Overlay "+" at 31.512,-30.028 h0.6 r225; Bottom Overlay "-" at 29.664,-28.181 h0.6 r225; Bottom Overlay "+" at 28.515,-30.29 h0.6 r45; Bottom Overlay "-" at 30.298,-32.044 h0.6 r45; Bottom Overlay "S" at 30.595,-29.111 h0.6 r225; Bottom Overlay "R" at 28.709,-30.997 h0.6 r225
S6: Bottom Overlay "+" at 15.65,40.521 h0.6 r337.5; Bottom Overlay "-" at 14.65,38.107 h0.6 r337.5; Bottom Overlay "+" at 17.039,37.853 h0.6 r157.5; Bottom Overlay "-" at 17.977,40.172 h0.6 r157.5; Bottom Overlay "S" at 15.154,39.323 h0.6 r337.5; Bottom Overlay "R" at 17.618,38.302 h0.6 r337.5
S7: Bottom Overlay "+" at 17.588,-39.718 h0.6 r202.5; Bottom Overlay "-" at 16.588,-37.304 h0.6 r202.5; Bottom Overlay "+" at 14.72,-38.814 h0.6 r22.5; Bottom Overlay "-" at 15.696,-41.117 h0.6 r22.5; Bottom Overlay "S" at 17.092,-38.52 h0.6 r202.5; Bottom Overlay "R" at 14.628,-39.541 h0.6 r202.5
S8: Bottom Overlay "R" at 1.618,42.197 h0.6; Bottom Overlay "S" at -1.049,42.197 h0.6; Bottom Overlay "-" at 1.235,44.062 h0.6 r180; Bottom Overlay "+" at 1.255,41.56 h0.6 r180; Bottom Overlay "-" at -1.049,40.881 h0.6; Bottom Overlay "+" at -1.049,43.494 h0.6
S9: Bottom Overlay "R" at -1.618,-42.197 h0.6 r180; Bottom Overlay "S" at 1.049,-42.197 h0.6 r180; Bottom Overlay "-" at -1.235,-44.062 h0.6; Bottom Overlay "+" at -1.255,-41.56 h0.6; Bottom Overlay "-" at 1.049,-40.881 h0.6 r180; Bottom Overlay "+" at 1.049,-43.494 h0.6 r180
S10: Bottom Overlay "+" at -17.588,39.718 h0.6 r22.5; Bottom Overlay "-" at -16.588,37.304 h0.6 r22.5; Bottom Overlay "+" at -14.72,38.814 h0.6 r202.5; Bottom Overlay "-" at -15.696,41.117 h0.6 r202.5; Bottom Overlay "S" at -17.092,38.52 h0.6 r22.5; Bottom Overlay "R" at -14.628,39.541 h0.6 r22.5
S11: Bottom Overlay "R" at -17.618,-38.302 h0.6 r157.5; Bottom Overlay "S" at -15.154,-39.323 h0.6 r157.5; Bottom Overlay "-" at -17.977,-40.172 h0.6 r337.5; Bottom Overlay "+" at -17.039,-37.853 h0.6 r337.5; Bottom Overlay "-" at -14.65,-38.107 h0.6 r157.5; Bottom Overlay "+" at -15.65,-40.521 h0.6 r157.5
S12: Bottom Overlay "+" at -31.512,30.028 h0.6 r45; Bottom Overlay "-" at -29.664,28.181 h0.6 r45; Bottom Overlay "+" at -28.515,30.29 h0.6 r225; Bottom Overlay "-" at -30.298,32.044 h0.6 r225; Bottom Overlay "S" at -30.595,29.111 h0.6 r45; Bottom Overlay "R" at -28.709,30.997 h0.6 r45
S13: Bottom Overlay "R" at -30.997,-28.709 h0.6 r135; Bottom Overlay "S" at -29.111,-30.595 h0.6 r135; Bottom Overlay "-" at -32.044,-30.298 h0.6 r315; Bottom Overlay "+" at -30.29,-28.515 h0.6 r315; Bottom Overlay "-" at -28.181,-29.664 h0.6 r135; Bottom Overlay "+" at -30.028,-31.512 h0.6 r135
S14: Bottom Overlay "+" at -40.521,15.65 h0.6 r67.5; Bottom Overlay "-" at -38.107,14.65 h0.6 r67.5; Bottom Overlay "+" at -37.853,17.039 h0.6 r247.5; Bottom Overlay "-" at -40.172,17.977 h0.6 r247.5; Bottom Overlay "S" at -39.323,15.154 h0.6 r67.5; Bottom Overlay "R" at -38.302,17.618 h0.6 r67.5
S15: Bottom Overlay "R" at -39.541,-14.628 h0.6 r112.5; Bottom Overlay "S" at -38.52,-17.092 h0.6 r112.5; Bottom Overlay "-" at -41.117,-15.696 h0.6 r292.5; Bottom Overlay "+" at -38.814,-14.72 h0.6 r292.5; Bottom Overlay "-" at -37.304,-16.588 h0.6 r112.5; Bottom Overlay "+" at -39.718,-17.588 h0.6 r112.5
S16: Bottom Overlay "R" at -42.197,1.618 h0.6 r90; Bottom Overlay "S" at -42.197,-1.049 h0.6 r90; Bottom Overlay "-" at -44.062,1.235 h0.6 r270; Bottom Overlay "+" at -41.56,1.255 h0.6 r270; Bottom Overlay "-" at -40.881,-1.049 h0.6 r90; Bottom Overlay "+" at -43.494,-1.049 h0.6 r90